# Altium PCB UsbKiller.PcbDoc
Units mil, origin at the board's own origin, x right, y up, seen from the top; angles counter-clockwise.
Board outline 1298.75 x 551 mil, 2 copper layers (Top Layer, Bottom Layer); 23 components, 13 nets, 63 pads, 113 vias.
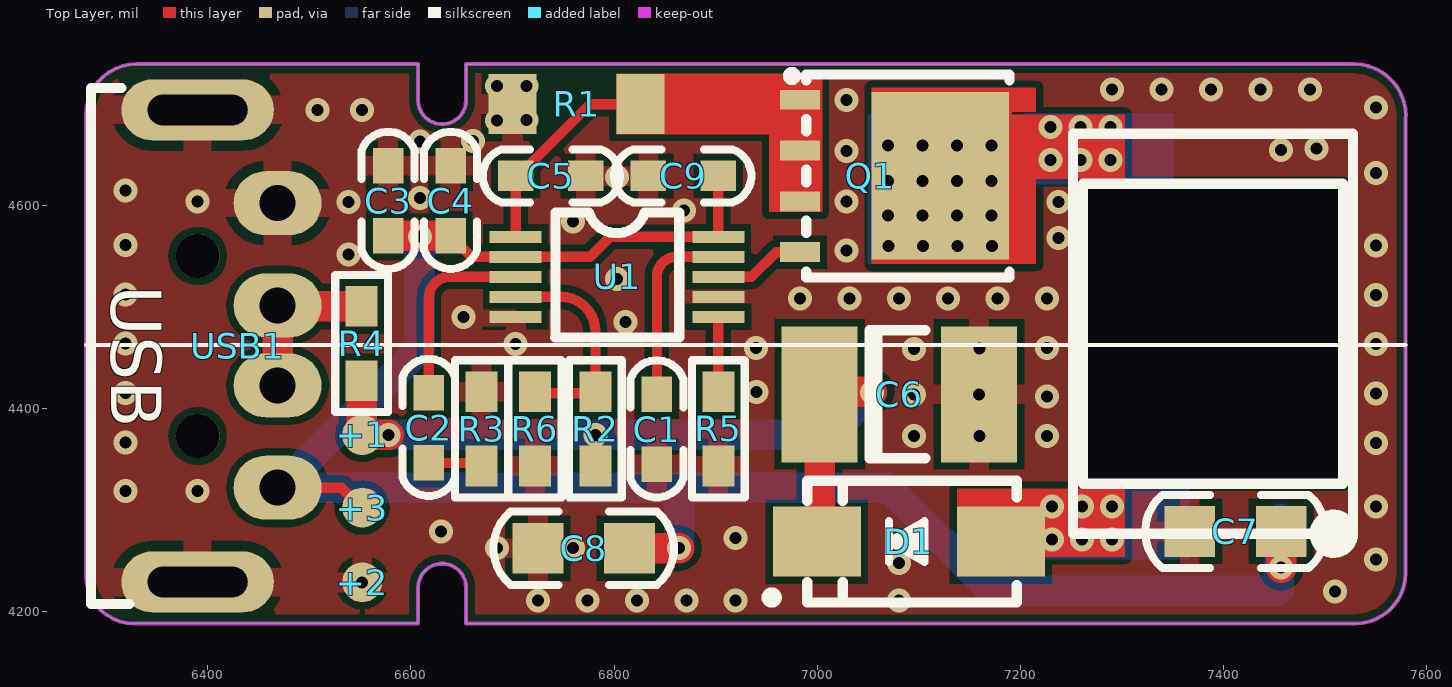
[diagram p0: Top Layer view]
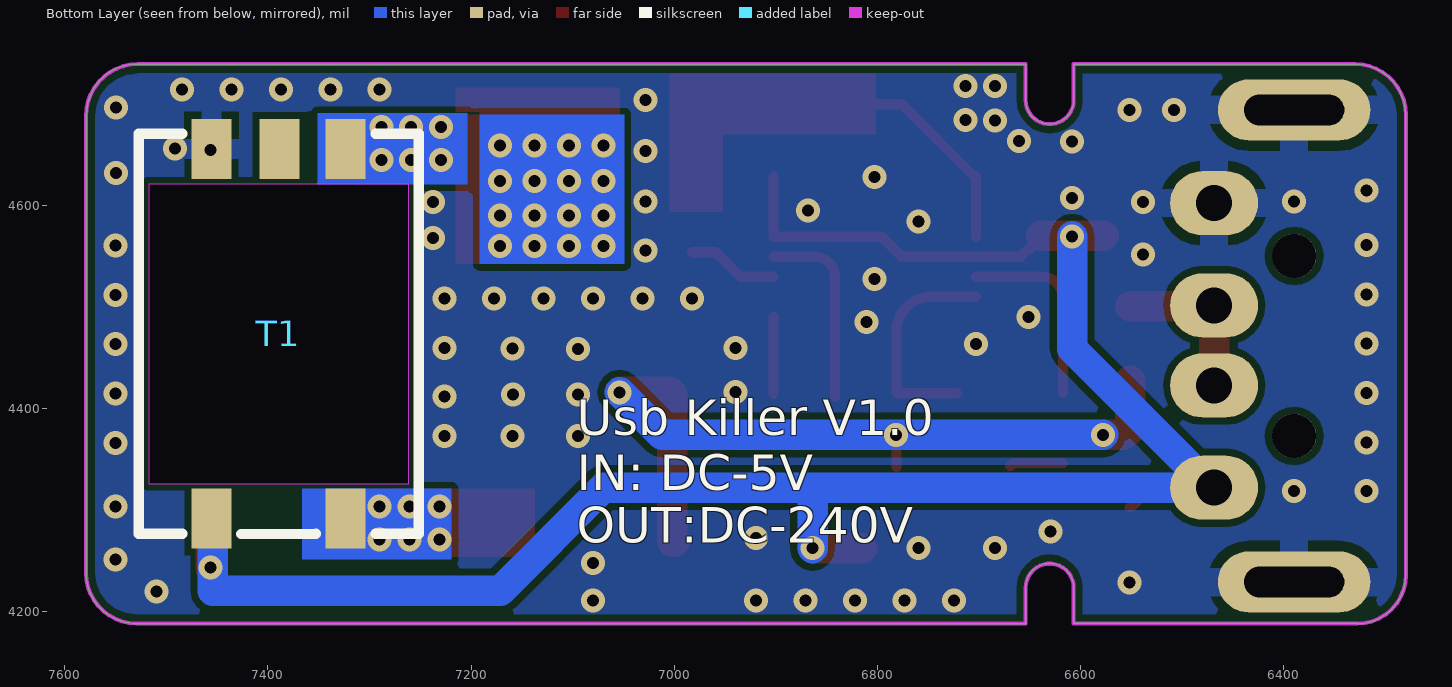
[diagram p1: Bottom Layer view, seen from below]
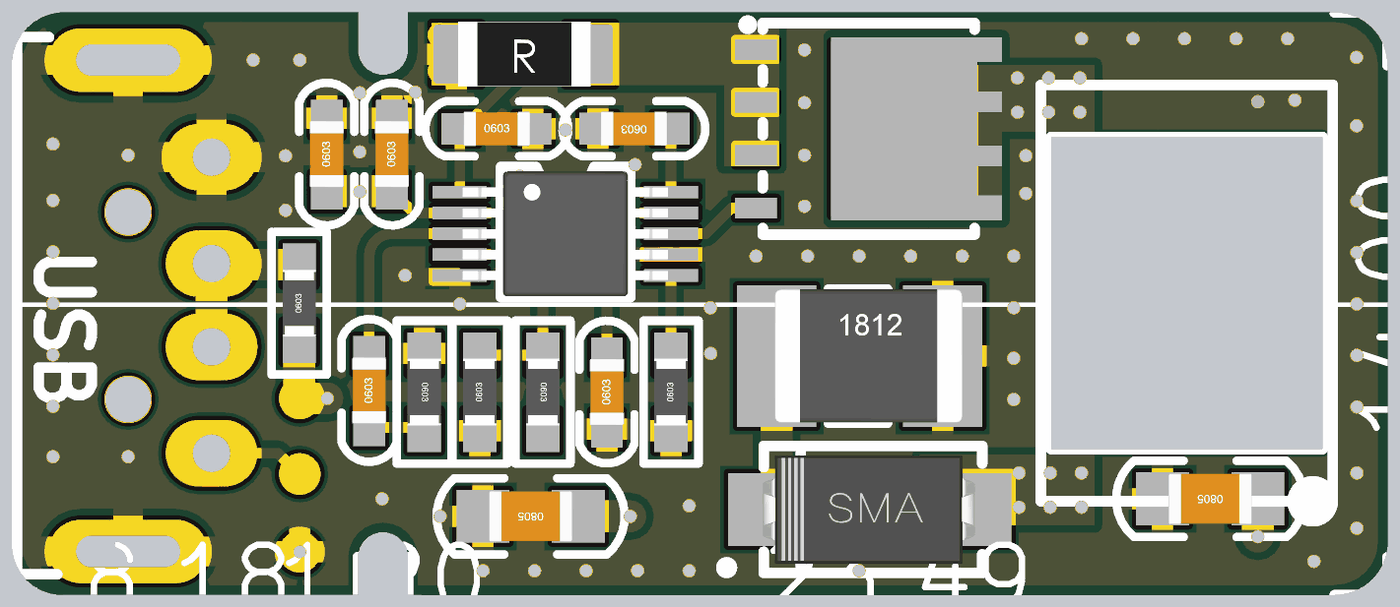
[diagram p2: 3D render of the assembled board from above, using the file's embedded part models]

## Layer stack, top to bottom
Top Solder: solder mask 0.4, Solder Resist, Dk 3.5
Top Layer: signal copper 1.4
Dielectric 1: dielectric 12.6, FR-4, Dk 4.8
Bottom Layer: signal copper 1.4
Bottom Solder: solder mask 0.4, Solder Resist, Dk 3.5

## Board outline
6328,4188.25 6328.32,4188.57 6607,4188.57 6607,4223.93 cw(c6630.62,4223.93) 6654.24,4223.93 6654.24,4188.5 6654.24,4188.18 7529,4188 7529,4188.25 ccw(c7529,4238.25) 7579,4238.25 7579,4689 7578.75,4689 ccw(c7528.75,4689) 7528.75,4739 7529,4739 6654.24,4739 6654.24,4703.57 cw(c6630.62,4703.57) 6607,4703.57 6607,4739 6330,4739 ccw(c6330,4689.25) 6280.25,4689.25 6280.25,4236 ccw(c6328,4236)
cut-out: 7261.5,4326 7261.5,4621 7517.5,4621 7517.5,4326

## Design rules (kind name [scope] priority, off if disabled: settings)
Clearance [All] p1: gap=7 ignorepadtopadclearanceinfootprint=TRUE
PolygonConnect [All] p1: thpad.connectstyle=Relief thpad.reliefconductorwidth=28 thpad.reliefentries=4 thpad.polygonreliefangle="90 Angle" thpad.airgapwidth=10 smdpad.connectstyle=Relief smdpad.reliefconductorwidth=20 smdpad.reliefentries=4 smdpad.polygonreliefangle="90 Angle" smdpad.airgapwidth=7 via.connectstyle=Direct via.reliefconductorwidth=10 via.reliefentries=4 via.polygonreliefangle="90 Angle" via.airgapwidth=10
RoutingVias [All] p1: holewidth=28 width=50 viastyle="Through Hole" minholewidth=28 minwidth=50 maxholewidth=28 maxwidth=50
SolderMaskExpansion [All] p1: expansion=4 istentingtop=FALSE
UnRoutedNet [All] p1: checkbadconnections=TRUE
Width [All] p1: maxlimit=70 minlimit=8 preferedwidth=10 minimp=50.000000 maximp=50.000000 favimp=50.000000
29 further rules are at their usual default settings.

## Components (designator, comment, footprint, x,y, rotation, side; value= is the part's Value field where it differs from the comment)
+1 "TEST" "Test Point SMD 1.0" 6552,4374 r0 top
+2 "TEST" "Test Point SMD 1.0" 6552,4229 r0 top
+3 "TEST" "Test Point SMD 1.0" 6552,4302.5 r0 top
C1 "1uf" "C 0603" 6842,4380.04 r90 top
C2 "22nf" "C 0603" 6617.5,4381.5 r90 top
C3 "22uf" "C 0603" 6577.5,4605 r90 top
C4 "100nf" "C 0603" 6639,4605 r90 top
C5 "10nf" "C 0603" 6738.07,4628.9 r0 top
C6 "1uf" 1812 7079,4414 r0 top
C7 "10uf" "C 0805" 7411.5,4279 r180 top
C8 "10uf" "C 0805" 6770,4262.5 r180 top
C9 "100nf" "C 0603" 6867.49,4629 r180 top
D1 "ES2J_C5390" SMA 7090,4269 r180 top
Q1 "TPH1R403NL" PDFN8 7113.1,4641.5 r270 top locked
R1 "0.025" "RES 1206" 6763,4699.5 r0 top
R2 "300k" "R 0603" 6781.5,4380 r270 top
R3 "40.2k" "R 0603" 6669.5,4380 r270 top
R4 "NC" "R 0603" 6551.5,4464 r90 top
R5 "300k" "R 0603" 6902.5,4380 r90 top
R6 "2k" "R 0603" 6722,4380 r90 top
T1 "TTRN-060S-013-T" "TTRN-013 DORP" 7368,4462 r90 top
U1 "LM3481QMM/NOPB" VSSOP-10 6794,4524 r0 top
USB1 "USB" USB_A/P_A 6390,4461.58 r270 top locked

## Footprints (in the part's own frame and the unit in brackets; to place one, negate y for a bottom-side part, rotate by r counter-clockwise, add the part's x,y. Pads: shape width x height; smd on the part's side, far side on the other; paste and mask are expansions set on the pad)
1812 [mm] "Chip Capacitor; Body 4.5 x 3.2 mm (LxW typ)"
  rect 1.9x3.4 smd: 1(-1.95,0) 2(2.032,0)
  silkscreen extent -0.7,-1.6 0.7,1.6, body extent -2,-1.6 2.5,1.6, height 1.6
"C 0603" [mil] "无极性贴片电容"
  rect 35x30 smd: 1(-35,0) 2(34,0)
  silkscreen extent -67,-26 67,26, body extent -31,-16 31,16, height 32
"C 0805" [mil] "无极性贴片电容"
  rect 50x50 smd: 1(-45,0) 2(45,0)
  silkscreen extent -89,-36 89,36, body extent -39,-24 39,24, height 20
PDFN8 [mil]
  rect 19.6x39.4 smd: 1(-62.4,-130.3) 2(-12.4,-130.3) 3(37.6,-130.3) 4(87.6,-130.3)
  rect 165x135 smd: 5(12.5,7.9)
  Top Layer region: -74.01,-59.43 -74.01,101.98 -50.39,101.98 -50.39,78.36 -22.83,78.36 -22.83,101.98 -3.14,101.98 -3.14,78.36 28.35,78.36 28.35,101.98 48.04,101.98 48.04,78.36 75.6,78.36 75.6,101.98 99.22,101.98 99.22,-59.43
  silkscreen extent -90,-142 113,76
"R 0603" [mil] "1/10W贴片电阻"
  rect 40x31.5 smd: 1(-36.5,0) 2(36.5,0)
  silkscreen extent -68,-26 68,26, body extent -31,-16 32,16, height 16
"RES 1206" [mm] "贴片电阻1206封装"
  rect 1.2x1.5 smd paste-3: 1(-1.6,0) 2(1.6,0)
  body extent -1.56,-0.77 1.61,0.77, height 0.61
SMA [mm] "4.5x2.6*2.2mm（长宽高，不包括引脚）"
  rect 2.2x1.75 smd: 1(-2.3,0) 2(2.3,0)
  silkscreen extent -2.7,-1.52 3.56,1.52, body extent -2.53,-1.3 2.58,1.3, height 2.15
"Test Point SMD 1.0" [mm]
  round 1 smd paste-2: 1(0,0)
"TTRN-013 DORP" [mm]
  rect 1.5x1 smd far side: 1(-4.328,-2.225) 2(-4.329,1.125) 3(4.918,-2.226) 5(4.919,1.124) EMPTY(4.918,-0.526)
  silkscreen extent -5.19,-4.05 5.29,2.96
USB_A/P_A [mm] "A型USB 插头，20*13*4.5mm"
  round 1.1 hole 1.1: 0(-2.25,0) 0(2.25,0)
  oval 1.6x2.2 hole 0.9: 1(3.543,2) 2(0.987,2) 3(-1.013,2) 4(-3.569,2)
  oval 1.524x3.81 hole 0.762 slot 2.5 at 90 deg: 4(-5.9,0) 4(5.9,0)
  silkscreen extent -6.45,-2.67 6.45,-1.7, body extent -6.47,-17.9 6.47,2.1, height 3.25
VSSOP-10 [mil]
  rect 51.18x11.8 smd: 1(-90.95,45.07) 2(-90.94,25.38) 4(-90.95,-13.99) 5(-90.95,-33.67) 8(108.52,5.7)
  rect 51.18x11.81 smd: 3(-90.93,5.7) 7(108.55,-13.99) 9(108.5,25.38) 10(108.5,45.07)
  rect 51.19x11.81 smd: 6(108.49,-33.67)
  silkscreen extent -52,-54 70,69, body extent -88,-53 106,65, height 43

## Part data
+1 +2 +3: "测试点", BOM名称=测试点, 学习资源=www.ooocke.com, 版权归属=源创客
C1 C2 C3 C4 C5 C6 C7 C8 C9: library part Cap, "贴片电容", LatestRevisionDate=17-Jul-2002, LatestRevisionNote="Re-released for DXP Platform.", PackageDescription="Radial Cap, Thru-Hole; 2 Leads; 0.3 in Pin Spacing", PackageReference=RAD-0.3, Published=8-Jun-2000, Publisher="Altium Limited"
D1: BOM_LCSC Assembly=Yes, BOM_Manufacturer=MDD, BOM_Manufacturer Part=ES2J, BOM_Supplier=LCSC, BOM_Supplier Part=C5390, image=//image.lceda.cn/szlcsc/C5390.jpg, SMT Type=Extend, spicePre=D, spiceSymbolName=ES2J_C5390
Q1: BOM_LCSC Assembly=Yes, BOM_Manufacturer=TOSHIBA, BOM_Manufacturer Part=TPH1R403NL, BOM_Supplier=LCSC, BOM_Supplier Part=C83440, SMT Type=Extend, spicePre=Q, spiceSymbolName=TPH1R403NL
R1 R2 R3 R4 R5 R6: library part Res1, "贴片电阻", LatestRevisionDate=17-Jul-2002, LatestRevisionNote="Re-released for DXP Platform.", PackageDescription="Axial Device, Thru-Hole; 2 Leads; 0.3 in Pin Spacing", PackageReference=AXIAL-0.3, Published=8-Jun-2000, Publisher="Altium Limited"
U1: BOM_Manufacturer="Texas Instruments", BOM_Manufacturer Part=LM3481QMM/NOPB, BOM_Supplier=LCSC, BOM_Supplier Part=C205461, Contributor=LCSC, spicePre=U, spiceSymbolName=LM3481QMM/NOPB
USB1: library part USB-A/P, "USB-A型公接口", BOM名称=USB-A型公接口, 学习资源=www.ooocke.com, 版权归属=源创客
T1: Contributor=ChaoJiSuanMiao, spicePre=T, spiceSymbolName=TTRN-060S-013-T

## Via types
v1: diameter 23.62, hole 11.81, Top Layer to Bottom Layer, tented both sides, 113 vias

## Nets (pads, with @x,y where several pads share a name; then routed paths per layer and width w, separated by ;. In a path a pad name is that pad's centre, name@x,y a point inside that pad or via, vN(x,y) a via of type N, cw(c..) or ccw(c..) an arc to the next point about the centre after c; other vN are vias at no path point)
240hv: +1.1 C6.1 D1.2 R2.2 R4.1 | length 800.4
  Top Layer w10: R2.2@6781.5,4342.5 v1@6781.5,4373
  Top Layer w30: R4.1 6551.5,4380 6557.5,4374 v1(6578,4374) ; D1.2 7002.23,4269 C6.1 7004.73,4416.5 v1@7053.67,4416.5
  Bottom Layer w30: v1(6578,4374) v1(6781.85,4374.02) 7011.92,4374.02 v1(7053.84,4415.93)
GND: +2.1 C1.1 C3.2 C4.2 C5.2 C6.2 C7.2 C8.2 C9.2 R1.1 R3.1 R5.1 R6.1 T1.3 U1.5 U1.7 USB1.4
  other v1: 6725,4211.08 6773.66,4211.08 6822.31,4211.08 6870.97,4211.08 6919.62,4211.08 7080.11,4211.08 7509.5,4220 6552,4229 7080.11,4248.03 7550,4251.27 6684.5,4262.5 6759.63,4262.5 6919.62,4272.5 6629.74,4279 7550,4303.5 6319,4318.86 6390,4318.86 6319,4366.5 7550,4366 7095,4373 7159.5,4373 7226.08,4373 7226.08,4412 7095,4414 7159,4414 6319,4415.16 7550,4414.66 6939.88,4416.5 7095,4458.5 7159.5,4459 6939.71,4459.69 7226.08,4459.69 6703.05,4463.31 7550,4463.31 6319,4463.81 6811,4485 6651.5,4490.33 6982.8,4508.5 7031.46,4508.5 7080.11,4508.5 7128.77,4508.5 7177.42,4508.5 7226.08,4508.5 6319,4512.47 7550,4511.97 6802.9,4527.5 6538.54,4551.83 7028.5,4555.65 6319,4561.12 7550,4560.62 7237.5,4567.83 6759.63,4584.14 6868.5,4595 6538.54,4603.3 6390,4603.9 7028.5,4603.9 7237.5,4603.5 6608.68,4607 6319,4614.5 6802.9,4627.84 7549.68,4631.75 7028.5,4653.52 7456.5,4654.49 7491.5,4656 6608.68,4662.86 6661,4663.5 6684.5,4683.5 6713.5,4684 6508.01,4693.87 6552,4693.87 7549.68,4696.39 7028.5,4703.5 7290,4714.04 7338.66,4714.04 7387.31,4714.04 7435.97,4714.04 7484.62,4714.04 6684.5,4717.5 6713.5,4717.5
HV240: R4.2 USB1.2 USB1.3 | length 161.9
  Top Layer w30: USB1.2 USB1.3 6469.71,4500.5 R4.2
NetC1_2: C1.2 U1.9 | length 189.4
  Top Layer w10: C1.2@6842,4412 6842,4529.7 cw(c6861.69,4529.7) 6861.69,4549.38 U1.9
NetC2_1: C2.1 R3.2 | length 53.2
  Top Layer w10: C2.1 6666.5,4346.5 R3.2
NetC2_2: C2.2 U1.3 | length 190.7
  Top Layer w10: C2.2 6617.5,4508.51 cw(c6638.69,4508.51) 6638.69,4529.7 U1.3
NetC5_1: C5.1 Q1.1 Q1.2 Q1.3 R1.2 U1.1 | length 212
  Top Layer w10: U1.1@6703.07,4569.07 C5.1 6705.57,4628.9 6776.18,4699.5 R1.2
NetD1_1: D1.1 T1.2
  other v1: 7231,4271.14 7260.5,4271.14 7290,4271.14 7231,4303.5 7260.5,4303.5 7290,4303.5
NetQ1_4: Q1.4 U1.8 | length 90.3
  Top Layer w10: U1.8 6935.2,4529.7 6959.4,4553.9 Q1.4
NetQ1_5: Q1.5 T1.5
  other v1: 7070,4560 7103.93,4560 7137.86,4560 7171.8,4560 7069.7,4590.16 7103.64,4590.16 7137.57,4590.16 7171.5,4590.16 7069.7,4623.73 7103.64,4623.73 7137.57,4623.73 7171.5,4623.73 7229.5,4644.64 7259,4644.64 7288.5,4644.64 7069.7,4658.93 7103.64,4658.93 7137.57,4658.93 7171.5,4658.93 7229.5,4677 7259,4677 7288.5,4677
NetR2_1: R2.1 R6.2 U1.4 | length 218.1
  Top Layer w10: U1.4 6747.5,4510.01 cw(c6747.5,4476.01) 6781.5,4476.01 6781.5,4415.5 6781,4415 R6.2@6722,4415
NetR5_2: R5.2 U1.6 | length 75.8
  Top Layer w10: R5.2@6902.49,4414.51 U1.6
VIN: +3.1 C3.1 C4.1 C7.1 C8.1 C9.1 T1.1 U1.2 U1.10 USB1.1 | length 2042
  Top Layer w10: USB1.1 6531.46,4322.1 6551.06,4302.5 +3.1 ; C4.1 6639,4567.5 6649,4557.5 6651.5,4557.5 6659.62,4549.38 U1.2 6776.31,4549.38 6796,4569.07 U1.10 ; U1.10 C9.1
  Top Layer w30: C3.1 C4.1 ; C8.1 v1(6864,4262.5) ; v1(7456.5,4243.3) C7.1
  Bottom Layer w30: USB1.1 USB1.1@6471.62,4322.1 ; v1@6608.5,4569.43 6608.5,4458.98 USB1.1@6471.62,4322.1 ; v1(6864,4262.5) 6864,4322.1 ; T1.1 7454.17,4290.17 7454.17,4220.5 7171.5,4220.5 7069.9,4322.1 6864,4322.1 ; USB1.1@6471.62,4322.1 6864,4322.1
  other v1: 6608.68,4569.43
pads on no net: T1.EMPTY USB1.0

## Polygon pours and split planes (outlines as drawn)
GND on Top Layer "GND_L01_P005" (solid, remove dead copper, pour order 5): 6280,4739 7579.21,4739 7579.21,4188.25 6280,4188.25
GND on Bottom Layer "GND_L02_P008" (solid, remove dead copper, pour order 8): 7580.5,4739.5 6281.29,4739.5 6281.29,4188.75 7580.5,4188.75

## Keep-outs
Keep-Out Layer:
  lines w4: 6330,4739 ccw(c6330,4689) 6280,4689 6280,4236.25 ccw(c6328,4236.25) 6328,4188.25 6607,4188.25 6607,4223.68 cw(c6630.62,4223.68) 6654.24,4223.68 6654.24,4188.25 7240,4188.25 7529.25,4188.25 ; 6330.07,4738.93 6607,4738.93 6607,4703.5 ccw(c6630.62,4703.5) 6654.24,4703.5 6654.24,4738.93 ; 6654.24,4739 6795.5,4739 7078.79,4739 7526,4739 ; 7528,4739 cw(c7528,4687.79) 7579.21,4687.79 ; 7529.51,4188.51 ccw(c7529.51,4238) 7579,4238 7579,4686

## Other copper
Top Layer:
  region net NetC5_1: 6952.5,4593.5 7004.73,4593.5 7004.73,4729.5 6802,4729.5 6802,4670 6952.5,4670
  region net NetQ1_5: 7053.67,4689.25 7302.5,4689.25 7302.5,4626 7215.08,4626 7215.08,4542.28 7053.67,4542.28
  region net NetD1_1: 7302.5,4321 7302.5,4254 7137.5,4254 7137.5,4321
Bottom Layer:
  region net NetQ1_5: 7049.5,4689.15 7191.5,4689.11 7191.5,4542.5 7049.5,4542.5
  region net NetQ1_5: 7203.77,4690.46 7203.77,4620.96 7350.77,4620.96 7350.77,4690.46
  region net NetD1_1: 7219.5,4321 7219.5,4251.5 7366.5,4251.5 7366.5,4321

## Silkscreen, mask and mechanical layers (free items; w line width, h text height)
Top Overlay:
  lines w4: 6280,4462.62 7579,4462.62
Bottom Overlay:
  text "Usb Killer V1.0" at 7096,4362 h60
  text "IN: DC-5V" at 7096,4308 h60
  text "OUT:DC-240V" at 7096,4256 h60
Bottom Solder:
  region: 7049.5,4690.52 7191.5,4690.48 7191.5,4542.5 7049.5,4542.5
Mechanical 1:
  lines w4: 6328,4739 6607,4739 ; 6330,4739 ccw(c6330,4689.25) 6280.25,4689.25 6280.25,4236 ccw(c6328,4236) 6328,4188.25 6328.32,4188.57 6607,4188.57 ; 6607,4188.5 6607,4223.93 cw(c6630.62,4223.93) 6654.24,4223.93 6654.24,4188.5 ; 6654.24,4188.18 7529,4188 ; 7528.75,4739 cw(c7528.75,4689) 7578.75,4689 ; 7529,4188.25 ccw(c7529,4238.25) 7579,4238.25 7579,4689 ; 7529,4739 6654.24,4739 6654.24,4703.57 cw(c6630.62,4703.57) 6607,4703.57 6607,4739 ; 6607,4739 6607,4739
  lines w10: 7517.41,4326 7261.5,4326 7261.5,4621 7517.5,4621 7517.5,4326

## Dimensions
6654.24,4223.93 to 7579,4238 on Top Overlay
6607,4223.93 to 6654.24,4223.93 on Top Overlay
6285,4207.65 to 6607,4223.93 on Top Overlay
7529,4739 to 7529,4188 on Top Overlay
6280,4689 to 7579,4689 on Top Overlay